# Altium PCB PCB1.PcbDoc (part 2 of 4)
Units mil, origin at the board's own origin, x right, y up, seen from the top; angles counter-clockwise.
Board outline 2700 x 1000 mil, 4 copper layers (L1, L2, L3, L4), stack 61.583 mil thick; 64 components, 75 nets, 299 pads, 161 vias.
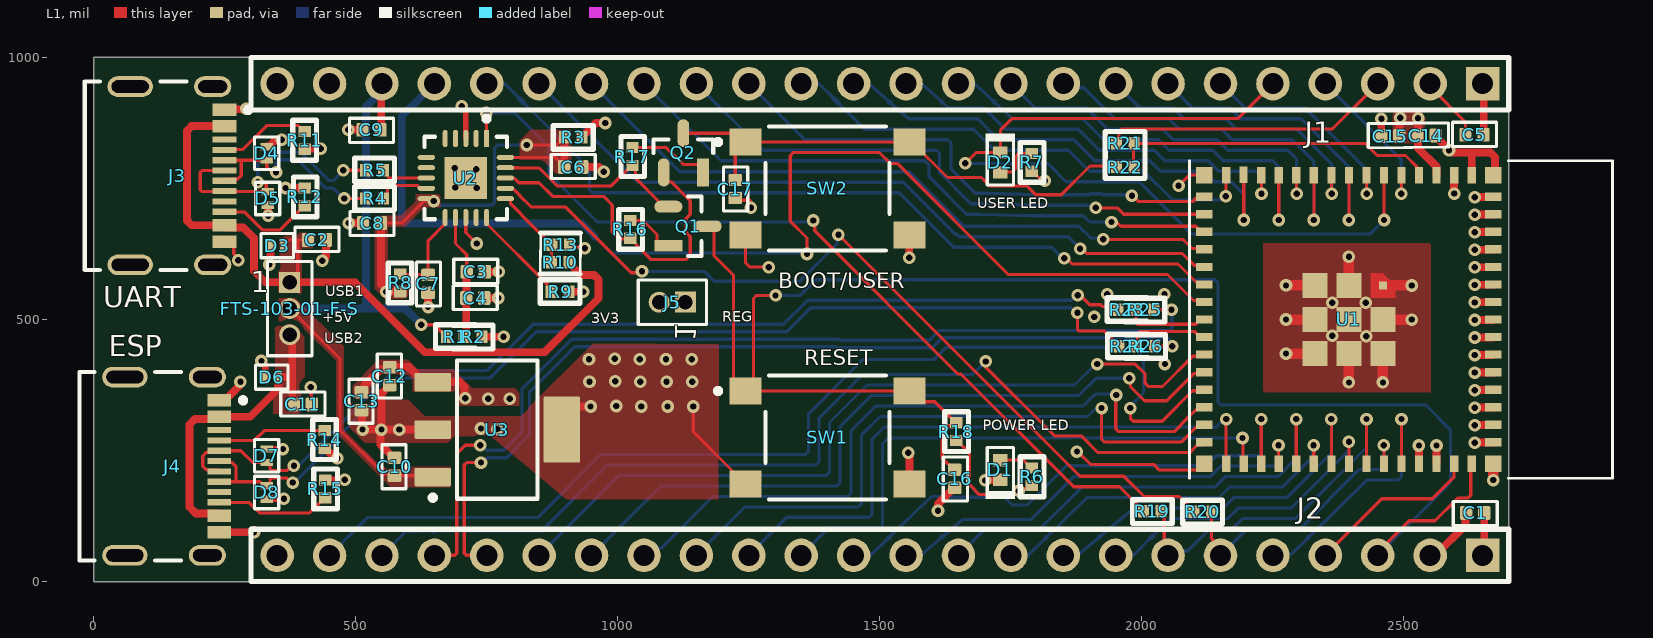
[diagram p0: L1 view]

## Part data (continued)
R1 R2 R3 R8 R19 R20 R23 R24 R25 R26: library part RC0402JR-070RL, "RES 0 OHM JUMPER 1/16W 0402", Case Code (Imperial)=0402, LCSC Part Number=C60485, Manufacturer="Yageo Group", Max Operating Temperature=155°C, Max Power Dissipation=63mW, Min Operating Temperature=-55°C, Power Dissipation=62.5mW, Supplier Part Number=311-0.0JRTR-ND, Temperature Coefficient=200ppm/°C, Tolerance=5%, Voltage Rating=50V, Case/Package=0402, Category="Chip SMD Resistors", China RoHS=Non-Compliant, ComponentLink1Description=https://datasheet.octopart.com:443/RC0402JR-070RL-Yageo-datasheet-182189538.pdf?src-supplier=IHS, ComponentLink1URL=https://datasheet.octopart.com:443/RC0402JR-070RL-Yageo-datasheet-182189538.pdf?src-supplier=IHS, ComponentLink2Description=https://datasheet.octopart.com:443/RC0402JR-070RL-Yageo-datasheet-10408619.pdf?src-supplier=Newark, ComponentLink2URL=https://datasheet.octopart.com:443/RC0402JR-070RL-Yageo-datasheet-10408619.pdf?src-supplier=Newark, ComponentLink3Description=https://datasheet.octopart.com:443/RC0402JR-070RL-Yageo-Group-datasheet-181964826.pdf?src-supplier=Newark, ComponentLink3URL=https://datasheet.octopart.com:443/RC0402JR-070RL-Yageo-Group-datasheet-181964826.pdf?src-supplier=Newark, ComponentLink4Description=https://datasheet.octopart.com:443/RC0402JR-070RL-Yageo-Group-datasheet-190305687.pdf?src-supplier=Future+Electronics, ComponentLink4URL=https://datasheet.octopart.com:443/RC0402JR-070RL-Yageo-Group-datasheet-190305687.pdf?src-supplier=Future+Electronics, ComponentLink5Description=https://datasheet.octopart.com:443/RC0402JR-070RL-Yageo-datasheet-164759695.pdf?src-supplier=Future+Electronics, ComponentLink5URL=https://datasheet.octopart.com:443/RC0402JR-070RL-Yageo-datasheet-164759695.pdf?src-supplier=Future+Electronics, ComponentLink6Description=https://datasheet.octopart.com:443/RC0402JR-070RL-Yageo-datasheet-137700087.pdf?src-supplier=Future+Electronics, ComponentLink6URL=https://datasheet.octopart.com:443/RC0402JR-070RL-Yageo-datasheet-137700087.pdf?src-supplier=Future+Electronics, ComponentLink7Description=https://datasheet.octopart.com:443/RC0402JR-070RL-Yageo-datasheet-12531192.pdf?src-supplier=Seeed+Studio, ComponentLink7URL=https://datasheet.octopart.com:443/RC0402JR-070RL-Yageo-datasheet-12531192.pdf?src-supplier=Seeed+Studio, ComponentLink8Description=https://datasheet.octopart.com:443/RC0402JR-070RL-Yageo-datasheet-8324527.pdf?src-supplier=TME, ComponentLink8URL=https://datasheet.octopart.com:443/RC0402JR-070RL-Yageo-datasheet-8324527.pdf?src-supplier=TME, ComponentLink9Description=https://datasheet.octopart.com:443/RC0402JR-070RL-Yageo-datasheet-62067350.pdf?src-supplier=Farnell, ComponentLink9URL=https://datasheet.octopart.com:443/RC0402JR-070RL-Yageo-datasheet-62067350.pdf?src-supplier=Farnell, ComponentLink10Description=https://datasheet.octopart.com:443/RC0402JR-070RL-Yageo-datasheet-8329306.pdf?src-supplier=element14, ComponentLink10URL=https://datasheet.octopart.com:443/RC0402JR-070RL-Yageo-datasheet-8329306.pdf?src-supplier=element14, ComponentLink11Description=https://datasheet.octopart.com:443/RC0402JR-070RL-Yageo-datasheet-505231.pdf?src-supplier=element14, ComponentLink11URL=https://datasheet.octopart.com:443/RC0402JR-070RL-Yageo-datasheet-505231.pdf?src-supplier=element14, ComponentLink12Description=https://datasheet.octopart.com:443/RC0402JR-070RL-Yageo-datasheet-175423674.pdf?src-supplier=SOS+electronic, ComponentLink12URL=https://datasheet.octopart.com:443/RC0402JR-070RL-Yageo-datasheet-175423674.pdf?src-supplier=SOS+electronic, ComponentLink13Description=https://datasheet.octopart.com/RC0402JR-070RL-Yageo-datasheet-73766026.pdf, ComponentLink13URL=https://datasheet.octopart.com/RC0402JR-070RL-Yageo-datasheet-73766026.pdf, ComponentLink14Description=http://sigma.octopart.com:80/conflict_mineral_statement/Yageo-company-3.pdf?src-supplier=Compliance+Statements, ComponentLink14URL=http://sigma.octopart.com:80/conflict_mineral_statement/Yageo-company-3.pdf?src-supplier=Compliance+Statements, ComponentLink15Description=http://sigma.octopart.com:80/rohs_statement/Yageo-company-2.pdf?src-supplier=Compliance+Statements, ComponentLink15URL=http://sigma.octopart.com:80/rohs_statement/Yageo-company-2.pdf?src-supplier=Compliance+Statements, Composition="Thick Film", Contact Plating=Tin, Depth=500µm, Features="Moisture Resistant", Height=350µm, Lead Free="Lead Free", Length=1mm, Lifecycle Status=Production, Manufacturer Part Number=RC0402JR-070RL, Military Standard=Not, Mounting Technology="Surface Mount", Number of Terminals=2, Number of Terminations=2, Packaging="Tape & Reel", Pins=2, Power Rating=63mW, Pricing="10000=0.00206, 20000=0.00185, 30000=0.00175, 50000=0.00163, 70000=0.00155, 100000=0.00148, 120000=0.00145, 240000=0.00134, 250000=0.00133 (USD)", Radiation Hardening=No, REACH SVHC=Yes, RoHS=Compliant, Schedule B="8533290000, 8533290000|8533290000, 8533290000|8533290000|8533290000, 8533290000|8533290000|8533290000|8533290000", Stock=13862373, Supplier=DigiKey, Termination=SMD/SMT, Voltage Rating (DC)=50V, Width=500µm
R4 R5 R21 R22: library part RC0402FR-0727RL, "RC0402FR-0727RL", Case Code (Imperial)=0402, Case Code (Metric)=1005, LCSC Part Number=C138021, Manufacturer="Yageo Group", Max Operating Temperature=155°C, Max Power Dissipation=63mW, Min Operating Temperature=-55°C, Power Dissipation=62.5mW, Supplier Part Number=YAG3086CT-ND, Temperature Coefficient=100ppm/°C, Tolerance=1%, Voltage Rating=50V, Case/Package=0402, Category="Chip SMD Resistors", China RoHS=Non-Compliant, ComponentLink1Description=https://datasheet.octopart.com:443/RC0402FR-0727RL-Yageo-datasheet-175887523.pdf?src-supplier=Newark, ComponentLink1URL=https://datasheet.octopart.com:443/RC0402FR-0727RL-Yageo-datasheet-175887523.pdf?src-supplier=Newark, ComponentLink2Description=https://datasheet.octopart.com:443/RC0402FR-0727RL-Yageo-datasheet-8324527.pdf?src-supplier=Newark, ComponentLink2URL=https://datasheet.octopart.com:443/RC0402FR-0727RL-Yageo-datasheet-8324527.pdf?src-supplier=Newark, ComponentLink3Description=https://datasheet.octopart.com:443/RC0402FR-0727RL-Yageo-datasheet-103092701.pdf?src-supplier=Upverter, ComponentLink3URL=https://datasheet.octopart.com:443/RC0402FR-0727RL-Yageo-datasheet-103092701.pdf?src-supplier=Upverter, ComponentLink4Description=https://datasheet.octopart.com:443/RC0402FR-0727RL-Yageo-datasheet-10408619.pdf?src-supplier=element14+APAC, ComponentLink4URL=https://datasheet.octopart.com:443/RC0402FR-0727RL-Yageo-datasheet-10408619.pdf?src-supplier=element14+APAC, ComponentLink5Description=https://datasheet.octopart.com:443/RC0402FR-0727RL-Yageo-datasheet-62067350.pdf?src-supplier=element14+APAC, ComponentLink5URL=https://datasheet.octopart.com:443/RC0402FR-0727RL-Yageo-datasheet-62067350.pdf?src-supplier=element14+APAC, ComponentLink6Description=https://datasheet.octopart.com:443/RC0402FR-0727RL-Yageo-Group-datasheet-176638170.pdf?src-supplier=Future+Electronics, ComponentLink6URL=https://datasheet.octopart.com:443/RC0402FR-0727RL-Yageo-Group-datasheet-176638170.pdf?src-supplier=Future+Electronics, ComponentLink7Description=https://datasheet.octopart.com:443/RC0402FR-0727RL-Yageo-datasheet-164759695.pdf?src-supplier=Future+Electronics, ComponentLink7URL=https://datasheet.octopart.com:443/RC0402FR-0727RL-Yageo-datasheet-164759695.pdf?src-supplier=Future+Electronics, ComponentLink8Description=https://datasheet.octopart.com:443/RC0402FR-0727RL-Yageo-datasheet-137700087.pdf?src-supplier=Future+Electronics, ComponentLink8URL=https://datasheet.octopart.com:443/RC0402FR-0727RL-Yageo-datasheet-137700087.pdf?src-supplier=Future+Electronics, ComponentLink9Description=https://datasheet.octopart.com:443/RC0402FR-0727RL-Yageo-datasheet-12531192.pdf?src-supplier=Future+Electronics, ComponentLink9URL=https://datasheet.octopart.com:443/RC0402FR-0727RL-Yageo-datasheet-12531192.pdf?src-supplier=Future+Electronics, ComponentLink10Description=https://datasheet.octopart.com:443/RC0402FR-0727RL-Yageo-datasheet-175423674.pdf?src-supplier=SOS+electronic, ComponentLink10URL=https://datasheet.octopart.com:443/RC0402FR-0727RL-Yageo-datasheet-175423674.pdf?src-supplier=SOS+electronic, ComponentLink11Description=https://datasheet.octopart.com:443/RC0402FR-0727RL-Yageo-datasheet-8329306.pdf?src-supplier=SOS+electronic, ComponentLink11URL=https://datasheet.octopart.com:443/RC0402FR-0727RL-Yageo-datasheet-8329306.pdf?src-supplier=SOS+electronic, ComponentLink12Description=https://datasheet.octopart.com:443/RC0402FR-0727RL-Yageo-datasheet-148775077.pdf?src-supplier=TME, ComponentLink12URL=https://datasheet.octopart.com:443/RC0402FR-0727RL-Yageo-datasheet-148775077.pdf?src-supplier=TME, ComponentLink13Description=https://datasheet.octopart.com/RC0402FR-0727RL-Yageo-datasheet-73766026.pdf, ComponentLink13URL=https://datasheet.octopart.com/RC0402FR-0727RL-Yageo-datasheet-73766026.pdf, ComponentLink14Description=http://sigma.octopart.com:80/conflict_mineral_statement/Yageo-company-3.pdf?src-supplier=Compliance+Statements, ComponentLink14URL=http://sigma.octopart.com:80/conflict_mineral_statement/Yageo-company-3.pdf?src-supplier=Compliance+Statements, ComponentLink15Description=http://sigma.octopart.com:80/rohs_statement/Yageo-company-2.pdf?src-supplier=Compliance+Statements, ComponentLink15URL=http://sigma.octopart.com:80/rohs_statement/Yageo-company-2.pdf?src-supplier=Compliance+Statements, Composition="Thick Film", Country of Origin="Mainland China, Taiwan", Depth=500µm, Export Control Classification Number (ECCN) Code=EAR99, Features="Moisture Resistant", Harmonized Tariff Schedule (HTS) Code=8533.21.00.30, Height=350µm, Introduction Date=2008-07-18, Lead Free="Lead Free", Length=1mm, Lifecycle Status=Production, Manufacturer Part Number=RC0402FR-0727RL, Military Standard=Not, Mounting Technology="Surface Mount", Number of Terminals=2, Number of Terminations=2, Pins=2, Power Rating=63mW, Pricing="1=0.1, 10=0.007, 25=0.0068, 50=0.0062, 100=0.0051, 250=0.00308 (USD)", REACH SVHC=Yes, RoHS=Compliant, Schedule B="8533210045, 8533210045|8533210045, 8533210045|8533210045|8533210045, 8533210045|8533210045|8533210045|8533210045", Stock=288305, Supplier=DigiKey, Termination=SMD/SMT, Voltage Rating (AC)=50V, Voltage Rating (DC)=50V, Weight=652.039032µg, Width=500µm, Working Voltage=50V
R6 R7: library part RC0402FR-071KL, "RES 1K OHM 1% 1/16W 0402", Case Code (Imperial)=0402, LCSC Part Number=C106235, Manufacturer="Yageo Group", Max Operating Temperature=155°C, Min Operating Temperature=-55°C, Power Dissipation=62.5mW, Power Rating=63mW, Supplier Part Number=311-1.00KLRDKR-ND, Temperature Coefficient=100ppm/°C, Tolerance=1%, Voltage Rating=50V, Case Code (Metric)=0402, Case/Package=0402, Category="Chip SMD Resistors", China RoHS=Non-Compliant, ComponentLink1Description=https://datasheet.octopart.com:443/RC0402FR-071KL-Yageo-datasheet-175887523.pdf?src-supplier=IHS, ComponentLink1URL=https://datasheet.octopart.com:443/RC0402FR-071KL-Yageo-datasheet-175887523.pdf?src-supplier=IHS, ComponentLink2Description=https://datasheet.octopart.com:443/RC0402FR-071KL-Yageo-datasheet-164759695.pdf?src-supplier=Upverter, ComponentLink2URL=https://datasheet.octopart.com:443/RC0402FR-071KL-Yageo-datasheet-164759695.pdf?src-supplier=Upverter, ComponentLink3Description=https://datasheet.octopart.com:443/RC0402FR-071KL-Yageo-datasheet-103092701.pdf?src-supplier=Upverter, ComponentLink3URL=https://datasheet.octopart.com:443/RC0402FR-071KL-Yageo-datasheet-103092701.pdf?src-supplier=Upverter, ComponentLink4Description=https://sigma.octopart.com:443/138820526/technical_drawing/Yageo-RC0402FR-071KL.pdf?src-supplier=Upverter, ComponentLink4URL=https://sigma.octopart.com:443/138820526/technical_drawing/Yageo-RC0402FR-071KL.pdf?src-supplier=Upverter, ComponentLink5Description=https://datasheet.octopart.com:443/RC0402FR-071KL-Yageo-datasheet-98239111.pdf?src-supplier=Upverter, ComponentLink5URL=https://datasheet.octopart.com:443/RC0402FR-071KL-Yageo-datasheet-98239111.pdf?src-supplier=Upverter, ComponentLink6Description=https://datasheet.octopart.com:443/RC0402FR-071KL-Yageo-Group-datasheet-190305687.pdf?src-supplier=Future+Electronics, ComponentLink6URL=https://datasheet.octopart.com:443/RC0402FR-071KL-Yageo-Group-datasheet-190305687.pdf?src-supplier=Future+Electronics, ComponentLink7Description=https://datasheet.octopart.com:443/RC0402FR-071KL-Yageo-datasheet-12531192.pdf?src-supplier=Future+Electronics, ComponentLink7URL=https://datasheet.octopart.com:443/RC0402FR-071KL-Yageo-datasheet-12531192.pdf?src-supplier=Future+Electronics, ComponentLink8Description=https://datasheet.octopart.com:443/RC0402FR-071KL-Yageo-datasheet-137700087.pdf?src-supplier=Future+Electronics, ComponentLink8URL=https://datasheet.octopart.com:443/RC0402FR-071KL-Yageo-datasheet-137700087.pdf?src-supplier=Future+Electronics, ComponentLink9Description=https://datasheet.octopart.com:443/RC0402FR-071KL-Yageo-datasheet-8324255.pdf?src-supplier=Future+Electronics, ComponentLink9URL=https://datasheet.octopart.com:443/RC0402FR-071KL-Yageo-datasheet-8324255.pdf?src-supplier=Future+Electronics, ComponentLink10Description=https://datasheet.octopart.com:443/RC0402FR-071KL-Yageo-datasheet-10408619.pdf?src-supplier=Newark, ComponentLink10URL=https://datasheet.octopart.com:443/RC0402FR-071KL-Yageo-datasheet-10408619.pdf?src-supplier=Newark, ComponentLink11Description=https://datasheet.octopart.com:443/RC0402FR-071KL-Yageo-datasheet-8324527.pdf?src-supplier=Newark, ComponentLink11URL=https://datasheet.octopart.com:443/RC0402FR-071KL-Yageo-datasheet-8324527.pdf?src-supplier=Newark, ComponentLink12Description=https://datasheet.octopart.com:443/RC0402FR-071KL-Yageo-datasheet-62067350.pdf?src-supplier=Farnell, ComponentLink12URL=https://datasheet.octopart.com:443/RC0402FR-071KL-Yageo-datasheet-62067350.pdf?src-supplier=Farnell, ComponentLink13Description=https://datasheet.octopart.com:443/RC0402FR-071KL-Yageo-datasheet-8329306.pdf?src-supplier=element14, ComponentLink13URL=https://datasheet.octopart.com:443/RC0402FR-071KL-Yageo-datasheet-8329306.pdf?src-supplier=element14, ComponentLink14Description=https://datasheet.octopart.com:443/RC0402FR-071KL-Yageo-datasheet-505231.pdf?src-supplier=element14, ComponentLink14URL=https://datasheet.octopart.com:443/RC0402FR-071KL-Yageo-datasheet-505231.pdf?src-supplier=element14, ComponentLink15Description=https://datasheet.octopart.com:443/RC0402FR-071KL-Yageo-datasheet-175423674.pdf?src-supplier=SOS+electronic, ComponentLink15URL=https://datasheet.octopart.com:443/RC0402FR-071KL-Yageo-datasheet-175423674.pdf?src-supplier=SOS+electronic, ComponentLink16Description=https://datasheet.octopart.com:443/RC0402FR-071KL-Yageo-datasheet-148775077.pdf?src-supplier=TME, ComponentLink16URL=https://datasheet.octopart.com:443/RC0402FR-071KL-Yageo-datasheet-148775077.pdf?src-supplier=TME, ComponentLink17Description=https://datasheet.octopart.com:443/RC0402FR-071KL-Yageo-datasheet-79472498.pdf?src-supplier=Megastar, ComponentLink17URL=https://datasheet.octopart.com:443/RC0402FR-071KL-Yageo-datasheet-79472498.pdf?src-supplier=Megastar, ComponentLink18Description=https://datasheet.octopart.com/RC0402FR-071KL-Yageo-datasheet-73766026.pdf, ComponentLink18URL=https://datasheet.octopart.com/RC0402FR-071KL-Yageo-datasheet-73766026.pdf, ComponentLink19Description=http://sigma.octopart.com:80/conflict_mineral_statement/Yageo-company-3.pdf?src-supplier=Compliance+Statements, ComponentLink19URL=http://sigma.octopart.com:80/conflict_mineral_statement/Yageo-company-3.pdf?src-supplier=Compliance+Statements, ComponentLink20Description=http://sigma.octopart.com:80/rohs_statement/Yageo-company-2.pdf?src-supplier=Compliance+Statements, ComponentLink20URL=http://sigma.octopart.com:80/rohs_statement/Yageo-company-2.pdf?src-supplier=Compliance+Statements, Composition="Thick Film", Depth=500µm, Height=350µm, Lead Free="Lead Free", Length=1mm, Lifecycle Status=Production, Manufacturer Part Number=RC0402FR-071KL, Military Standard=Not, Mounting Technology="Surface Mount", Number of Terminals=2, Packaging="Tape & Reel", Pins=2, Pricing="1=0.1, 10=0.007, 25=0.0068, 50=0.0062, 100=0.0056, 250=0.00308 (USD)", REACH SVHC=Yes, RoHS=Compliant, Schedule B="8533210045, 8533210045|8533210045|8533210045|8533210045|8533210045|8533210045|8533210045|8533210045|8533210045|8533210045|8533210045|8533210045|8533210045|8533210045|8533210045|8533210045|8533210045|8533210045|8533210045|8533210045|8533210045|8533210045|8533210045|85", Stock=3210309, Supplier=DigiKey, Termination=SMD/SMT, Voltage Rating (AC)=50V, Voltage Rating (DC)=50V, Width=500µm, Working Voltage=50V
R9 R13 R16 R17 R18: library part AC0402FR-0710KL, "RES SMD 10K OHM 1% 1/16W 0402", Case Code (Imperial)=0402, Case Code (Metric)=1005, LCSC Part Number=C144807, Manufacturer="Yageo Group", Max Operating Temperature=155°C, Max Power Dissipation=63mW, Min Operating Temperature=-55°C, Power Dissipation=62.5mW, Supplier Part Number=YAG3436CT-ND, Temperature Coefficient=100ppm/°C, Tolerance=1%, Voltage Rating=50V, Case/Package=0402, Category="Chip SMD Resistors", China RoHS=Non-Compliant, ComponentLink1Description=https://datasheet.octopart.com:443/AC0402FR-0710KL-Yageo-datasheet-182189377.pdf?src-supplier=IHS, ComponentLink1URL=https://datasheet.octopart.com:443/AC0402FR-0710KL-Yageo-datasheet-182189377.pdf?src-supplier=IHS, ComponentLink2Description=https://datasheet.octopart.com:443/AC0402FR-0710KL-Yageo-datasheet-83209224.pdf?src-supplier=Upverter, ComponentLink2URL=https://datasheet.octopart.com:443/AC0402FR-0710KL-Yageo-datasheet-83209224.pdf?src-supplier=Upverter, ComponentLink3Description=https://datasheet.octopart.com:443/AC0402FR-0710KL-Yageo-datasheet-178509465.pdf?src-supplier=Newark, ComponentLink3URL=https://datasheet.octopart.com:443/AC0402FR-0710KL-Yageo-datasheet-178509465.pdf?src-supplier=Newark, ComponentLink4Description=https://datasheet.octopart.com:443/AC0402FR-0710KL-Yageo-datasheet-166720450.pdf?src-supplier=JRH+Electronics, ComponentLink4URL=https://datasheet.octopart.com:443/AC0402FR-0710KL-Yageo-datasheet-166720450.pdf?src-supplier=JRH+Electronics, ComponentLink5Description=https://datasheet.octopart.com:443/AC0402FR-0710KL-Yageo-datasheet-151884373.pdf?src-supplier=Future+Electronics, ComponentLink5URL=https://datasheet.octopart.com:443/AC0402FR-0710KL-Yageo-datasheet-151884373.pdf?src-supplier=Future+Electronics, ComponentLink6Description=https://datasheet.octopart.com:443/AC0402FR-0710KL-Yageo-Group-datasheet-189830439.pdf?src-supplier=Future+Electronics, ComponentLink6URL=https://datasheet.octopart.com:443/AC0402FR-0710KL-Yageo-Group-datasheet-189830439.pdf?src-supplier=Future+Electronics, ComponentLink7Description=https://datasheet.octopart.com:443/AC0402FR-0710KL-Yageo-datasheet-137699919.pdf?src-supplier=Future+Electronics, ComponentLink7URL=https://datasheet.octopart.com:443/AC0402FR-0710KL-Yageo-datasheet-137699919.pdf?src-supplier=Future+Electronics, ComponentLink8Description=https://datasheet.octopart.com:443/AC0402FR-0710KL-Yageo-datasheet-24580492.pdf?src-supplier=Future+Electronics, ComponentLink8URL=https://datasheet.octopart.com:443/AC0402FR-0710KL-Yageo-datasheet-24580492.pdf?src-supplier=Future+Electronics, ComponentLink9Description=https://datasheet.octopart.com:443/AC0402FR-0710KL-Yageo-datasheet-13029202.pdf?src-supplier=Future+Electronics, ComponentLink9URL=https://datasheet.octopart.com:443/AC0402FR-0710KL-Yageo-datasheet-13029202.pdf?src-supplier=Future+Electronics, ComponentLink10Description=https://datasheet.octopart.com/AC0402FR-0710KL-Yageo-datasheet-12512238.pdf, ComponentLink10URL=https://datasheet.octopart.com/AC0402FR-0710KL-Yageo-datasheet-12512238.pdf, ComponentLink11Description=https://datasheet.octopart.com:443/AC0402FR-0710KL-Yageo-Group-datasheet-164768995.pdf?src-supplier=ODG+(Origin+Data+Global), ComponentLink11URL=https://datasheet.octopart.com:443/AC0402FR-0710KL-Yageo-Group-datasheet-164768995.pdf?src-supplier=ODG+(Origin+Data+Global), ComponentLink12Description=https://datasheet.octopart.com:443/AC0402FR-0710KL-Yageo-datasheet-128677448.pdf?src-supplier=X-ON, ComponentLink12URL=https://datasheet.octopart.com:443/AC0402FR-0710KL-Yageo-datasheet-128677448.pdf?src-supplier=X-ON, ComponentLink13Description=http://sigma.octopart.com:80/conflict_mineral_statement/Yageo-company-3.pdf?src-supplier=Compliance+Statements, ComponentLink13URL=http://sigma.octopart.com:80/conflict_mineral_statement/Yageo-company-3.pdf?src-supplier=Compliance+Statements, ComponentLink14Description=http://sigma.octopart.com:80/rohs_statement/Yageo-company-2.pdf?src-supplier=Compliance+Statements, ComponentLink14URL=http://sigma.octopart.com:80/rohs_statement/Yageo-company-2.pdf?src-supplier=Compliance+Statements, Composition="Thick Film", Country of Origin="Mainland China, Taiwan", Depth=500µm, Export Control Classification Number (ECCN) Code=EAR99, Features="Automotive AEC-Q200, Moisture Resistant", Harmonized Tariff Schedule (HTS) Code=8533.21.00.30, Height=320µm, Introduction Date=2012-04-10, Lead Free="Lead Free", Length=990.6µm, Lifecycle Status=Production, Manufacturer Part Number=AC0402FR-0710KL, Military Standard=Not, Mounting Technology="Surface Mount", Number of Terminals=2, Number of Terminations=2, Packaging="Tape & Reel", Power Rating=62.5mW, Pricing="1=0.1, 10=0.008, 25=0.0076, 50=0.0072, 100=0.0066, 250=0.00576, 500=0.00406 (USD)", REACH SVHC=Yes, RoHS=Compliant, Schedule B="8533210045, 8533210045|8533210045|8533210045|8533210045|8533210045|8533210045|8533210045|8533210045|8533210045|8533210045|8533210045|8533210045|8533210045|8533210045|8533210045|8533210045|8533210045|8533210045|8533210045, 8533210045|8533210045|8533210045|8533210045|8533210045|8533210045|8533210045|8533210045|8533210045|8533210045|8533210045|8533210045|8533210045|8533210045|8533210045|8533210045|8533210045|8533210045|8533210045|8533210045|8533210045|8533210045|8533210045|85", Stock=1813256, Supplier=DigiKey, Termination=SMD/SMT, Width=500µm, Working Voltage=50V
R10: library part RC0402FR-074K7L, "RES 4.7K OHM 1% 1/16W 0402", Case Code (Imperial)=0402, Case Code (Metric)=1005, LCSC Part Number=C105871, Manufacturer="Yageo Group", Max Operating Temperature=155°C, Min Operating Temperature=-55°C, Power Dissipation=62.5mW, Power Rating=63mW, Supplier Part Number=311-4.7KLRDKR-ND, Temperature Coefficient=100ppm/°C, Tolerance=1%, Voltage Rating=50V, Case/Package=0402, Category="Chip SMD Resistors", China RoHS=Non-Compliant, ComponentLink1Description=https://datasheet.octopart.com:443/RC0402FR-074K7L-Yageo-datasheet-175887523.pdf?src-supplier=IHS, ComponentLink1URL=https://datasheet.octopart.com:443/RC0402FR-074K7L-Yageo-datasheet-175887523.pdf?src-supplier=IHS, ComponentLink2Description=https://datasheet.octopart.com:443/RC0402FR-074K7L-Yageo-datasheet-103092701.pdf?src-supplier=Upverter, ComponentLink2URL=https://datasheet.octopart.com:443/RC0402FR-074K7L-Yageo-datasheet-103092701.pdf?src-supplier=Upverter, ComponentLink3Description=https://datasheet.octopart.com:443/RC0402FR-074K7L-Yageo-datasheet-98239111.pdf?src-supplier=Upverter, ComponentLink3URL=https://datasheet.octopart.com:443/RC0402FR-074K7L-Yageo-datasheet-98239111.pdf?src-supplier=Upverter, ComponentLink4Description=https://datasheet.octopart.com:443/RC0402FR-074K7L-Yageo-Group-datasheet-190305687.pdf?src-supplier=Future+Electronics, ComponentLink4URL=https://datasheet.octopart.com:443/RC0402FR-074K7L-Yageo-Group-datasheet-190305687.pdf?src-supplier=Future+Electronics, ComponentLink5Description=https://datasheet.octopart.com:443/RC0402FR-074K7L-Yageo-datasheet-164759695.pdf?src-supplier=Future+Electronics, ComponentLink5URL=https://datasheet.octopart.com:443/RC0402FR-074K7L-Yageo-datasheet-164759695.pdf?src-supplier=Future+Electronics, ComponentLink6Description=https://datasheet.octopart.com:443/RC0402FR-074K7L-Yageo-datasheet-137700087.pdf?src-supplier=Future+Electronics, ComponentLink6URL=https://datasheet.octopart.com:443/RC0402FR-074K7L-Yageo-datasheet-137700087.pdf?src-supplier=Future+Electronics, ComponentLink7Description=https://datasheet.octopart.com:443/RC0402FR-074K7L-Yageo-Group-datasheet-190051977.pdf?src-supplier=Newark, ComponentLink7URL=https://datasheet.octopart.com:443/RC0402FR-074K7L-Yageo-Group-datasheet-190051977.pdf?src-supplier=Newark, ComponentLink8Description=https://datasheet.octopart.com:443/RC0402FR-074K7L-Yageo-datasheet-12531192.pdf?src-supplier=Newark, ComponentLink8URL=https://datasheet.octopart.com:443/RC0402FR-074K7L-Yageo-datasheet-12531192.pdf?src-supplier=Newark, ComponentLink9Description=https://datasheet.octopart.com:443/RC0402FR-074K7L-Yageo-datasheet-8324527.pdf?src-supplier=Newark, ComponentLink9URL=https://datasheet.octopart.com:443/RC0402FR-074K7L-Yageo-datasheet-8324527.pdf?src-supplier=Newark, ComponentLink10Description=https://datasheet.octopart.com:443/RC0402FR-074K7L-Yageo-datasheet-10408619.pdf?src-supplier=element14+APAC, ComponentLink10URL=https://datasheet.octopart.com:443/RC0402FR-074K7L-Yageo-datasheet-10408619.pdf?src-supplier=element14+APAC, ComponentLink11Description=https://datasheet.octopart.com:443/RC0402FR-074K7L-Yageo-datasheet-13691069.pdf?src-supplier=element14+APAC, ComponentLink11URL=https://datasheet.octopart.com:443/RC0402FR-074K7L-Yageo-datasheet-13691069.pdf?src-supplier=element14+APAC, ComponentLink12Description=https://datasheet.octopart.com:443/RC0402FR-074K7L-Yageo-datasheet-62067350.pdf?src-supplier=Farnell, ComponentLink12URL=https://datasheet.octopart.com:443/RC0402FR-074K7L-Yageo-datasheet-62067350.pdf?src-supplier=Farnell, ComponentLink13Description=https://datasheet.octopart.com:443/RC0402FR-074K7L-Yageo-datasheet-8329306.pdf?src-supplier=element14, ComponentLink13URL=https://datasheet.octopart.com:443/RC0402FR-074K7L-Yageo-datasheet-8329306.pdf?src-supplier=element14, ComponentLink14Description=https://datasheet.octopart.com:443/RC0402FR-074K7L-Yageo-datasheet-175423674.pdf?src-supplier=SOS+electronic, ComponentLink14URL=https://datasheet.octopart.com:443/RC0402FR-074K7L-Yageo-datasheet-175423674.pdf?src-supplier=SOS+electronic, ComponentLink15Description=https://datasheet.octopart.com:443/RC0402FR-074K7L-Yageo-datasheet-79472498.pdf?src-supplier=Megastar, ComponentLink15URL=https://datasheet.octopart.com:443/RC0402FR-074K7L-Yageo-datasheet-79472498.pdf?src-supplier=Megastar, ComponentLink16Description=https://datasheet.octopart.com/RC0402FR-074K7L-Yageo-datasheet-73766026.pdf, ComponentLink16URL=https://datasheet.octopart.com/RC0402FR-074K7L-Yageo-datasheet-73766026.pdf, ComponentLink17Description=http://sigma.octopart.com:80/conflict_mineral_statement/Yageo-company-3.pdf?src-supplier=Compliance+Statements, ComponentLink17URL=http://sigma.octopart.com:80/conflict_mineral_statement/Yageo-company-3.pdf?src-supplier=Compliance+Statements, ComponentLink18Description=http://sigma.octopart.com:80/rohs_statement/Yageo-company-2.pdf?src-supplier=Compliance+Statements, ComponentLink18URL=http://sigma.octopart.com:80/rohs_statement/Yageo-company-2.pdf?src-supplier=Compliance+Statements, Composition="Thick Film", Country of Origin="Mainland China, Taiwan", Depth=500µm, Export Control Classification Number (ECCN) Code=EAR99, Harmonized Tariff Schedule (HTS) Code=8533.21.00.30, Height=350µm, Introduction Date=2008-07-18, Lead Free="Lead Free", Length=1mm, Lifecycle Status=Production, Manufacturer Part Number=RC0402FR-074K7L, Military Standard=Not, Mounting Technology="Surface Mount", Number of Terminals=2, Packaging="Tape & Reel", Pins=2, Pricing="1=0.1, 10=0.007, 25=0.006, 50=0.005, 100=0.0046, 250=0.00328 (USD)", REACH SVHC=Yes, RoHS=Compliant, Schedule B="8533210045, 8533210045|8533210045, 8533210045|8533210045|8533210045, 8533210045|8533210045|8533210045|8533210045", Stock=5816017, Supplier=DigiKey, Termination=SMD/SMT, Voltage Rating (AC)=50V, Voltage Rating (DC)=50V, Width=500µm, Working Voltage=50V
R11 R12 R14 R15: library part AC0402FR-075K1L, "RES SMD 5.1K OHM 1% 1/16W 0402", Case Code (Imperial)=0402, Case Code (Metric)=1005, LCSC Part Number=C144745, Manufacturer="Yageo Group", Max Operating Temperature=155°C, Max Power Dissipation=63mW, Min Operating Temperature=-55°C, Power Dissipation=62.5mW, Supplier Part Number=YAG3503DKR-ND, Temperature Coefficient=100ppm/°C, Tolerance=1%, Voltage Rating=50V, Case/Package=0402, Category="Chip SMD Resistors", China RoHS=Non-Compliant, ComponentLink1Description=https://datasheet.octopart.com:443/AC0402FR-075K1L-Yageo-datasheet-182189377.pdf?src-supplier=IHS, ComponentLink1URL=https://datasheet.octopart.com:443/AC0402FR-075K1L-Yageo-datasheet-182189377.pdf?src-supplier=IHS, ComponentLink2Description=https://datasheet.octopart.com:443/AC0402FR-075K1L-Yageo-datasheet-83209224.pdf?src-supplier=Upverter, ComponentLink2URL=https://datasheet.octopart.com:443/AC0402FR-075K1L-Yageo-datasheet-83209224.pdf?src-supplier=Upverter, ComponentLink3Description=https://datasheet.octopart.com:443/AC0402FR-075K1L-Yageo-datasheet-178509465.pdf?src-supplier=Newark, ComponentLink3URL=https://datasheet.octopart.com:443/AC0402FR-075K1L-Yageo-datasheet-178509465.pdf?src-supplier=Newark, ComponentLink4Description=https://datasheet.octopart.com/AC0402FR-075K1L-Yageo-datasheet-12512238.pdf, ComponentLink4URL=https://datasheet.octopart.com/AC0402FR-075K1L-Yageo-datasheet-12512238.pdf, ComponentLink5Description=https://datasheet.octopart.com:443/AC0402FR-075K1L-Yageo-Group-datasheet-189830439.pdf?src-supplier=Future+Electronics, ComponentLink5URL=https://datasheet.octopart.com:443/AC0402FR-075K1L-Yageo-Group-datasheet-189830439.pdf?src-supplier=Future+Electronics, ComponentLink6Description=https://datasheet.octopart.com:443/AC0402FR-075K1L-Yageo-datasheet-166720450.pdf?src-supplier=Future+Electronics, ComponentLink6URL=https://datasheet.octopart.com:443/AC0402FR-075K1L-Yageo-datasheet-166720450.pdf?src-supplier=Future+Electronics, ComponentLink7Description=https://datasheet.octopart.com:443/AC0402FR-075K1L-Yageo-datasheet-151884373.pdf?src-supplier=Future+Electronics, ComponentLink7URL=https://datasheet.octopart.com:443/AC0402FR-075K1L-Yageo-datasheet-151884373.pdf?src-supplier=Future+Electronics, ComponentLink8Description=https://datasheet.octopart.com:443/AC0402FR-075K1L-Yageo-datasheet-137699919.pdf?src-supplier=Future+Electronics, ComponentLink8URL=https://datasheet.octopart.com:443/AC0402FR-075K1L-Yageo-datasheet-137699919.pdf?src-supplier=Future+Electronics, ComponentLink9Description=https://datasheet.octopart.com:443/AC0402FR-075K1L-Yageo-datasheet-24580492.pdf?src-supplier=Future+Electronics, ComponentLink9URL=https://datasheet.octopart.com:443/AC0402FR-075K1L-Yageo-datasheet-24580492.pdf?src-supplier=Future+Electronics, ComponentLink10Description=https://datasheet.octopart.com:443/AC0402FR-075K1L-Yageo-datasheet-13029202.pdf?src-supplier=Future+Electronics, ComponentLink10URL=https://datasheet.octopart.com:443/AC0402FR-075K1L-Yageo-datasheet-13029202.pdf?src-supplier=Future+Electronics, ComponentLink11Description=https://datasheet.octopart.com:443/AC0402FR-075K1L-Yageo-Group-datasheet-164768995.pdf?src-supplier=ODG+(Origin+Data+Global), ComponentLink11URL=https://datasheet.octopart.com:443/AC0402FR-075K1L-Yageo-Group-datasheet-164768995.pdf?src-supplier=ODG+(Origin+Data+Global), ComponentLink12Description=http://sigma.octopart.com:80/conflict_mineral_statement/Yageo-company-3.pdf?src-supplier=Compliance+Statements, ComponentLink12URL=http://sigma.octopart.com:80/conflict_mineral_statement/Yageo-company-3.pdf?src-supplier=Compliance+Statements, ComponentLink13Description=http://sigma.octopart.com:80/rohs_statement/Yageo-company-2.pdf?src-supplier=Compliance+Statements, ComponentLink13URL=http://sigma.octopart.com:80/rohs_statement/Yageo-company-2.pdf?src-supplier=Compliance+Statements, Composition="Thick Film", Country of Origin="Mainland China, Taiwan", Depth=500µm, Export Control Classification Number (ECCN) Code=EAR99, Features="Automotive AEC-Q200, Moisture Resistant", Harmonized Tariff Schedule (HTS) Code=8533.21.00.30, Height=320µm, Introduction Date=2012-04-10, Lead Free="Lead Free", Length=990.6µm, Lifecycle Status=Production, Manufacturer Part Number=AC0402FR-075K1L, Military Standard=Not, Mounting Technology="Surface Mount", Number of Terminals=2, Number of Terminations=2, Power Rating=62.5mW, Pricing="1=0.1, 10=0.008, 25=0.0068, 50=0.0052, 100=0.0041 (USD)", REACH SVHC=Yes, RoHS=Compliant, Schedule B="8533210045, 8533210045|8533210045|8533210045|8533210045|8533210045|8533210045|8533210045|8533210045|8533210045|8533210045|8533210045|8533210045|8533210045|8533210045|8533210045|8533210045|8533210045|8533210045|8533210045|8533210045|8533210045|8533210045|8533210045|85", Supplier=DigiKey, Width=500µm, Working Voltage=50V
SW1 SW2: "SWITCH TACTILE SPST-NO 0.05A 12V", Case/Package=SMD/SMT, Color=Black, Contact Current Rating=50mA, Contact Resistance=100mΩ, Insulation Resistance=100GΩ, LCSC Part Number=C221869, Manufacturer="C&K Components", Max Operating Temperature=60°C, Max Voltage Rating (DC)=12V, Min Operating Temperature=-20°C, Operating Force=1.96N, Supplier Part Number=CKN9085DKR-ND, Actuator Material="Nylon, Polyamide", Category="Tactile Switches", ComponentLink1Description=https://datasheet.octopart.com:443/PTS645SH50SMTR92LFS-C%26K-Components-datasheet-169841344.pdf?src-supplier=Farnell, ComponentLink1URL=https://datasheet.octopart.com:443/PTS645SH50SMTR92LFS-C%26K-Components-datasheet-169841344.pdf?src-supplier=Farnell, ComponentLink2Description=https://datasheet.octopart.com:443/PTS645SH50SMTR92LFS-C%26K-Components-datasheet-165782998.pdf?src-supplier=Farnell, ComponentLink2URL=https://datasheet.octopart.com:443/PTS645SH50SMTR92LFS-C%26K-Components-datasheet-165782998.pdf?src-supplier=Farnell, ComponentLink3Description=https://datasheet.octopart.com:443/PTS645SH50SMTR92LFS-C%26K-Components-datasheet-67873720.pdf?src-supplier=Upverter, ComponentLink3URL=https://datasheet.octopart.com:443/PTS645SH50SMTR92LFS-C%26K-Components-datasheet-67873720.pdf?src-supplier=Upverter, ComponentLink4Description=https://datasheet.octopart.com:443/PTS645SH50SMTR92-LFS-C%26K-Components-datasheet-141421486.pdf?src-supplier=Upverter, ComponentLink4URL=https://datasheet.octopart.com:443/PTS645SH50SMTR92-LFS-C%26K-Components-datasheet-141421486.pdf?src-supplier=Upverter, ComponentLink5Description=https://datasheet.octopart.com:443/PTS645SH50SMTR92-LFS-C%26K-Components-datasheet-110647872.pdf?src-supplier=TME, ComponentLink5URL=https://datasheet.octopart.com:443/PTS645SH50SMTR92-LFS-C%26K-Components-datasheet-110647872.pdf?src-supplier=TME, ComponentLink6Description=https://datasheet.octopart.com:443/PTS645SH50SMTR-92-LFS-C%26K-Components-datasheet-150821959.pdf?src-supplier=TME, ComponentLink6URL=https://datasheet.octopart.com:443/PTS645SH50SMTR-92-LFS-C%26K-Components-datasheet-150821959.pdf?src-supplier=TME, ComponentLink7Description=https://datasheet.octopart.com:443/PTS645SH50SMTR92LFS-C%26K-Components-datasheet-138128951.pdf?src-supplier=Future+Electronics, ComponentLink7URL=https://datasheet.octopart.com:443/PTS645SH50SMTR92LFS-C%26K-Components-datasheet-138128951.pdf?src-supplier=Future+Electronics, ComponentLink8Description=https://datasheet.octopart.com:443/PTS645SH50SMTR92LFS-C%26K-Components-datasheet-62111174.pdf?src-supplier=Future+Electronics, ComponentLink8URL=https://datasheet.octopart.com:443/PTS645SH50SMTR92LFS-C%26K-Components-datasheet-62111174.pdf?src-supplier=Future+Electronics, ComponentLink9Description=https://datasheet.octopart.com:443/PTS645SH50SMTR92LFS-C%26K-Components-datasheet-24578962.pdf?src-supplier=Future+Electronics, ComponentLink9URL=https://datasheet.octopart.com:443/PTS645SH50SMTR92LFS-C%26K-Components-datasheet-24578962.pdf?src-supplier=Future+Electronics, ComponentLink10Description=https://datasheet.octopart.com:443/PTS645SH50SMTR92-LFS-C%26K-Components-datasheet-12590747.pdf?src-supplier=Future+Electronics, ComponentLink10URL=https://datasheet.octopart.com:443/PTS645SH50SMTR92-LFS-C%26K-Components-datasheet-12590747.pdf?src-supplier=Future+Electronics, Contact Material=Bronze, Contact Plating=Silver, Country of Origin="Mainland China", Current Rating=50mA, Depth=9mm, Electrical Life=100kcycles, Export Control Classification Number (ECCN) Code=EAR99, Harmonized Tariff Schedule (HTS) Code=8536.50.90.40, Height=3.4544mm, Illumination Type="Illuminated, Non-Illuminated", Introduction Date=2013-05-01, Lead Free="Lead Free", Length=6mm, Life (Cycles)=100kcycles, Lifecycle Status=Production, Manufacturer Part Number=PTS645SH50SMTR92LFS, Max Current Rating=50mA, Mechanical Life=100kcycles, Mounting Technology="Surface Mount", Number of Positions=1, Orientation=Straight, Packaging="Tape & Reel (TR)", Pricing="1=0.35, 10=0.3, 25=0.2804, 100=0.251, 250=0.23256, 500=0.21948 (USD)", REACH SVHC=Yes, RoHS=Compliant, Stock=54521, Supplier=DigiKey, Switch Function=Off-Mom, Termination="Gull Wing", Throw Configuration=SPST, Voltage Rating (DC)=12V
U1: "SMD module, ESP32-S3FN8, 8 MB SPI flash, PCB antenna", LCSC Part Number=C2913206, Manufacturer="Espressif Systems", Supplier Part Number=5407-ESP32-S3-MINI-1-N8DKR-ND, Category="RF Transceiver Modules and Modems", ComponentLink1Description=https://datasheet.octopart.com:443/ESP32-S3-MINI-1-N8-Espressif-Systems-datasheet-188867343.pdf?src-supplier=TME, ComponentLink1URL=https://datasheet.octopart.com:443/ESP32-S3-MINI-1-N8-Espressif-Systems-datasheet-188867343.pdf?src-supplier=TME, ComponentLink2Description=https://datasheet.octopart.com:443/ESP32-S3-MINI-1-N8-Espressif-Systems-datasheet-165560562.pdf?src-supplier=TME, ComponentLink2URL=https://datasheet.octopart.com:443/ESP32-S3-MINI-1-N8-Espressif-Systems-datasheet-165560562.pdf?src-supplier=TME, ComponentLink3Description=https://datasheet.octopart.com:443/ESP32-S3-MINI-1-N8-Espressif-Systems-datasheet-165560559.pdf?src-supplier=TME, ComponentLink3URL=https://datasheet.octopart.com:443/ESP32-S3-MINI-1-N8-Espressif-Systems-datasheet-165560559.pdf?src-supplier=TME, ComponentLink4Description=https://datasheet.octopart.com:443/ESP32-S3-MINI-1-N8-Espressif-Systems-datasheet-192318068.pdf?src-supplier=HQonline, ComponentLink4URL=https://datasheet.octopart.com:443/ESP32-S3-MINI-1-N8-Espressif-Systems-datasheet-192318068.pdf?src-supplier=HQonline, Manufacturer Part Number=ESP32-S3-MINI-1-N8, Pricing="1=5.28, 10=4.566, 25=4.3196, 100=3.9802, 250=3.7768 (USD)", RoHS=Compliant, Stock=6938, Supplier=DigiKey
U2: "IC USB SERIAL FULL UART 20QFN", Ambient Temperature Range High=85°C, Case/Package=QFN, Clock Frequency=12.02MHz, LCSC Part Number=C132159, Manufacturer=FTDI, Max Supply Current=8.4mA, Max Supply Voltage=5.5V, Min Operating Temperature=-40°C, Min Supply Voltage=2.97V, Operating Supply Current=8mA, Operating Supply Voltage=5V, Supplier Part Number=768-1128-1-ND, Category="Interface ICs", ComponentLink1Description=https://datasheet.octopart.com:443/FT231XQ-R-FTDI-datasheet-182343132.pdf?src-supplier=IHS, ComponentLink1URL=https://datasheet.octopart.com:443/FT231XQ-R-FTDI-datasheet-182343132.pdf?src-supplier=IHS, ComponentLink2Description=https://datasheet.octopart.com:443/FT231XQ-R-FTDI-datasheet-11021087.pdf?src-supplier=HQonline, ComponentLink2URL=https://datasheet.octopart.com:443/FT231XQ-R-FTDI-datasheet-11021087.pdf?src-supplier=HQonline, ComponentLink3Description=https://datasheet.octopart.com:443/FT231XQ-R-FTDI-datasheet-28834672.pdf?src-supplier=SOS+electronic, ComponentLink3URL=https://datasheet.octopart.com:443/FT231XQ-R-FTDI-datasheet-28834672.pdf?src-supplier=SOS+electronic, ComponentLink4Description=https://datasheet.octopart.com:443/FT231XQ-R-FTDI-datasheet-68321328.pdf?src-supplier=TME, ComponentLink4URL=https://datasheet.octopart.com:443/FT231XQ-R-FTDI-datasheet-68321328.pdf?src-supplier=TME, ComponentLink5Description=https://datasheet.octopart.com:443/FT231XQ-R-FTDI-datasheet-134530624.pdf?src-supplier=SHENGYU+ELECTRONICS, ComponentLink5URL=https://datasheet.octopart.com:443/FT231XQ-R-FTDI-datasheet-134530624.pdf?src-supplier=SHENGYU+ELECTRONICS, Data Rate=12Mbps, Height=800µm, Height - Seated (Max)=800µm, Interface="UART, USB", Lead Free="Lead Free", Length=4mm, Lifecycle Status=Production, Manufacturer Part Number=FT231XQ-R, Max Operating Temperature=85°C, Mounting Technology="Surface Mount", Number of Channels=1, Number of Terminals=20, Pins=20, Pricing="1=2.34, 25=2.27, 100=2.2, 250=2, 500=1.82002, 1000=1.7625 (USD)", REACH SVHC=Yes, RoHS=Compliant, Stock=748, Supplier=DigiKey, Terminal Pitch=500µm, Weight=123.008581mg, Width=4mm
U3: "IC REG LIN 3.3V 1.5A SOT-223-4", Case/Package=SOT-223, Dropout Voltage=340mV, Input Bias Current=1mA, LCSC Part Number=C181262, Manufacturer="Texas Instruments", Manufacturer Lifecycle Status=ACTIVE, Max Operating Temperature=125°C, Max Output current=1.5A, Max Output Voltage=3.3V, Max Supply Voltage=20V, Min Current Limit=1.6A, Min Input Voltage=2.1V, Min Operating Temperature=-40°C, Supplier Part Number=296-24897-1-ND, Accuracy=3%, Category="LDO Voltage Regulators", ComponentLink1Description=https://datasheet.octopart.com:443/TL1963A-33DCYR-Texas-Instruments-datasheet-36835243.pdf?src-supplier=Texas+Instruments, ComponentLink1URL=https://datasheet.octopart.com:443/TL1963A-33DCYR-Texas-Instruments-datasheet-36835243.pdf?src-supplier=Texas+Instruments, ComponentLink2Description=https://octopart.com:443/opatz8j6/c1?t=gcB_oBpMcgQrekSKr-lJH_YKIv0gTe0NS1QC9sbrjddZDM1cj4z1v14jpIPotlTGXKxWWQ7DTWCH9O9JRBynChrIunrB8hkM_6oxgwadMdhW9E7pZRJPVRRmC22zQcJQ8152DD1RNS8EUYbTsPqZBYAAXkvwSZdtkB7GhhtQUyu-oL1zwOSWBDv03q8c6tSLBRUpbLCBS1JfMBp2oCxrA8xefTQ6karTQde3ztai2yZxAPvT7YGAiUcj-0blnr3IrHPIKWCTy3Fi70xwN1N77ntAWGQMAtJhcmeUYBFwndY9UX0t3qrZPG3moy8BipopiPEwH97laYjTV5WkvAAJk7ZyB6Z35AlWBxAdUkCl2Ckc4hj8njbZTEk98w0QaYhCZduuvvY&src-supplier=Texas+Instruments, ComponentLink2URL=https://octopart.com:443/opatz8j6/c1?t=gcB_oBpMcgQrekSKr-lJH_YKIv0gTe0NS1QC9sbrjddZDM1cj4z1v14jpIPotlTGXKxWWQ7DTWCH9O9JRBynChrIunrB8hkM_6oxgwadMdhW9E7pZRJPVRRmC22zQcJQ8152DD1RNS8EUYbTsPqZBYAAXkvwSZdtkB7GhhtQUyu-oL1zwOSWBDv03q8c6tSLBRUpbLCBS1JfMBp2oCxrA8xefTQ6karTQde3ztai2yZxAPvT7YGAiUcj-0blnr3IrHPIKWCTy3Fi70xwN1N77ntAWGQMAtJhcmeUYBFwndY9UX0t3qrZPG3moy8BipopiPEwH97laYjTV5WkvAAJk7ZyB6Z35AlWBxAdUkCl2Ckc4hj8njbZTEk98w0QaYhCZduuvvY&src-supplier=Texas+Instruments, ComponentLink3Description=https://datasheet.octopart.com:443/TL1963A-33DCYR-Texas-Instruments-datasheet-10255270.pdf?src-supplier=Texas+Instruments, ComponentLink3URL=https://datasheet.octopart.com:443/TL1963A-33DCYR-Texas-Instruments-datasheet-10255270.pdf?src-supplier=Texas+Instruments, ComponentLink4Description=https://sigma.octopart.com:443/49253063/technical_drawing/Texas-Instruments-TL1963A-33DCYR.pdf?src-supplier=Texas+Instruments, ComponentLink4URL=https://sigma.octopart.com:443/49253063/technical_drawing/Texas-Instruments-TL1963A-33DCYR.pdf?src-supplier=Texas+Instruments, ComponentLink5Description=https://datasheet.octopart.com:443/TL1963A-33DCYR-Texas-Instruments-datasheet-159117591.pdf?src-supplier=Augswan, ComponentLink5URL=https://datasheet.octopart.com:443/TL1963A-33DCYR-Texas-Instruments-datasheet-159117591.pdf?src-supplier=Augswan, ComponentLink6Description=https://datasheet.octopart.com:443/TL1963A-33DCYR-Texas-Instruments-datasheet-21820479.pdf?src-supplier=Newark, ComponentLink6URL=https://datasheet.octopart.com:443/TL1963A-33DCYR-Texas-Instruments-datasheet-21820479.pdf?src-supplier=Newark, ComponentLink7Description=https://datasheet.octopart.com:443/TL1963A-33DCYR-Texas-Instruments-datasheet-16079880.pdf?src-supplier=Farnell, ComponentLink7URL=https://datasheet.octopart.com:443/TL1963A-33DCYR-Texas-Instruments-datasheet-16079880.pdf?src-supplier=Farnell, ComponentLink8Description=https://datasheet.octopart.com:443/TL1963A-33DCYR-Texas-Instruments-datasheet-14171511.pdf?src-supplier=iiiC, ComponentLink8URL=https://datasheet.octopart.com:443/TL1963A-33DCYR-Texas-Instruments-datasheet-14171511.pdf?src-supplier=iiiC, ComponentLink9Description=http://sigma.octopart.com:80/reach_statement/Texas-Instruments-company-64.pdf?src-supplier=Compliance+Statements, ComponentLink9URL=http://sigma.octopart.com:80/reach_statement/Texas-Instruments-company-64.pdf?src-supplier=Compliance+Statements, ComponentLink10Description=http://sigma.octopart.com:80/conflict_mineral_statement/Texas-Instruments-company-63.pdf?src-supplier=Compliance+Statements, ComponentLink10URL=http://sigma.octopart.com:80/conflict_mineral_statement/Texas-Instruments-company-63.pdf?src-supplier=Compliance+Statements, Contact Plating=Tin, Height=1.8mm, Lead Free="Lead Free", Length=6.5mm, Lifecycle Status=Production, Manufacturer Part Number=TL1963A-33DCYR, Min Output Voltage=3.3V, Nominal Output Voltage=3.3V, Number of Outputs=1, Number of Regulators=1, Output Current=1.5A, Output Type=Fixed, Output Voltage=3.3V, Pins=4, Polarity=Positive, Pricing="1=3.13, 10=2.344, 25=2.1476, 100=1.9323, 250=1.82956, 500=1.76766, 1000=1.71669 (USD)", Quiescent Current=1mA, Radiation Hardening=No, REACH SVHC=No, RoHS=Compliant, Schedule B="8542390000, 8542390000|8542390000|8542390000|8542390000|8542390000", Stock=4026, Supplier=DigiKey, Thickness=1.6mm, Width=3.5mm

## Via types
v1: diameter 24, hole 12, L1 to L4, tented both sides, 161 vias

## Nets (pads, with @x,y where several pads share a name; then routed paths per layer and width w, separated by ;. In a path a pad name is that pad's centre, name@x,y a point inside that pad or via, vN(x,y) a via of type N, cw(c..) or ccw(c..) an arc to the next point about the centre after c; other vN are vias at no path point)
+3V3: C1.2 C5.2 C14.2 C15.1 J1.2 J2.1 J5.2 R2.1 R3.1 R6.2 R7.2 R18.2 U1.3 | length 4750.8
  L1 w6: R18.2@1646,268.99 1647.18,268.99 1671.31,244.86 1671.31,184.5 1689.82,166 1754.21,166 1761.21,173 v1(1765,173) 1768.79,173 1773.15,177.36 1784.37,177.36 R6.2@1790,182.99 ; R7.2@1790,782.99 1791.18,782.99 1806.49,767.68 1812.32,767.68 v1(1815,765) ; J1.2@2550,944 2617.35,876.65 C5.2@2617.35,852.44
  L1 w15: R2.1@741.01,467 v1(782,467) ; R3.1@932.01,848 932.01,849.18 957.83,875 v1(976,875) ; C15.1@2491.2,850 2491.2,883.2 v1(2493,885) ; v1(2527,884) 2526.62,883.62 2526.62,856.69 2525.8,855.86 2525.8,846.38 2526.86,845.31 2526.86,826.98 2561.99,791.85 2561.99,775.96 U1.3@2562.36,775.59 ; J1.2@2550,944 J1.2@2550,950 ; J2.1@2650,50 2653.2,53.2 C1.2@2653.2,131
  L2 w15: J1.2@2550,950 2494.72,894.72 2494.72,886.72 v1(2493,885) 2493.5,884.5 2526.5,884.5 v1(2527,884) 2529,884 2556.5,856.5 2556.5,738.17 2591.61,703.06 2591.61,230.93 2650,172.54 J2.1@2650,50
  L2 w20: v1(782,467) 1013,467 J5.2@1079,533 1082.83,536.83 1082.83,555.11 1174.58,646.86 1291.14,646.86 1511.44,426.56 1512.7,426.56 1733,206.25 1763.25,206.25 1765,208 ; v1(976,875) 976,873.92 1005,844.92 1005,558 1047.5,515.5 ; v1(1765,173) 1765,208 ; v1(2527,884) 2527,882.92 2525,880.92 2525,880 2469.5,824.5 2024.25,824.5 1964.75,765 v1(1815,765) 1765,715 1765,208
+3V3_FTDI: C6.2 C8.2 R3.2 R8.1 U2.10 U2.20 | length 825.3
  L1 w6: 548.2,566.58 558.01,556.78 v1(558.01,552.99) ; C8.2@548.2,684 587.96,684 629.96,726 v1(649,726) ; U2.20@785.41,809.37 785.5,809.46 880.72,809.46 897.89,792.28 C6.2@897.89,791.1 ; v1(826,833) 882.99,833 R3.2@893.68,843.69
  L1 w15: 548.2,566.58 C8.2@548.2,684 ; v1(558.01,552.99) R8.1@585,552.99 ; R3.2@893.68,843.69 894.86,843.69 897.99,846.82 R3.2@897.99,848 897.89,847.9 C6.2@897.89,791.1
  L4 w6: v1(649,726) 652.79,726 660.79,718 759.14,718 765,723.86 765,827 771,833 v1(826,833)
+3V3_REG: C12.1 C13.1 J5.1 U3.3 | length 1116
  L1 w15: C13.1@511,361.2 512.38,361.2 516.69,365.52 516.69,374.5 547.08,404.89 560.69,404.89 C12.1@565,409.2 601.58,409.2 630.24,380.55 U3.3@646.97,380.55 698.49,380.55 707.28,371.76 707.28,351.72 v1(709,350)
  L2 w40: 617.75,384 675,384 710,349 v1(753,349) v1(794,349) 851,292 1161.4,292 1186,316.6 1186,438.4 1129,495.4 J5.1@1129,533
+5V: C9.2 C10.2 FTS-103-01-F-S.2 J1.22 R1.1 U3.1 | length 1341.2
  L1 w6: FTS-103-01-F-S.2@374,521 469.88,425.12 469.88,288.63 553.12,205.4 570.4,205.4 C10.2@574,201.8 644.62,201.8 U3.1@646.97,199.45 ; v1(625,490) 650,490 666.19,473.81 667.37,473.81 673,468.18 R1.1@673,467
  L1 w15: C9.2@547.2,862 548.6,863.4 548.6,948.6 J1.22@550,950
  L4 w15: FTS-103-01-F-S.2@374,521 514,521 ; J1.22@550,950 550,936.74 519.41,906.15 519.41,526.41 514,521 ; v1(625,490) 594,521 514,521
+5V_VBUS1: C2.2 D3.2 FTS-103-01-F-S.1 J3.A4B9 J3.B4A9 R10.2 | length 1462.2
  L1 w6: D3.2@362.8,644.7 370.09,652 389.44,652 ; FTS-103-01-F-S.1@374,571 389,586 389,591.41 389.44,591.86 389.44,652 ; C2.2@408.8,652 389.44,652
  L1 w15: J3.A4B9@249.68,868.98 186.79,868.98 178,860.19 178,688.79 186.79,680 J3.B4A9@249.68,680 254,675.69 285.31,675.69 305.5,655.5 305.5,592.78 327.28,571 FTS-103-01-F-S.1@374,571 498.28,571 631.78,437.5 860.22,437.5 963.5,540.78 963.5,576.21 954.71,585 929.83,585 910.14,604.69 910.14,605.87 R10.2@907.01,609 ; D3.2@362.8,641 D3.2@362.8,644.7
+5V_VBUS2: C11.2 D6.2 FTS-103-01-F-S.3 J4.A4B9 J4.B4A9 | length 603.9
  L1 w15: J4.B4A9@239.57,125.59 235.26,129.9 195.1,129.9 183,142 183,300 193.26,310.26 235.26,310.26 J4.A4B9@239.57,314.57 298.57,314.57 352.8,368.8 D6.2@352.8,390 376.78,390 378.78,392 ; FTS-103-01-F-S.3@374,471 378.78,466.22 378.78,392 ; C11.2@381.8,338 378.78,341.01 378.78,392
-VCC_FTDI: C3.2 C4.2 R1.2 R2.2 U2.12 | length 238.5